# EAGLE board boomchak (EAGLE 5.11)
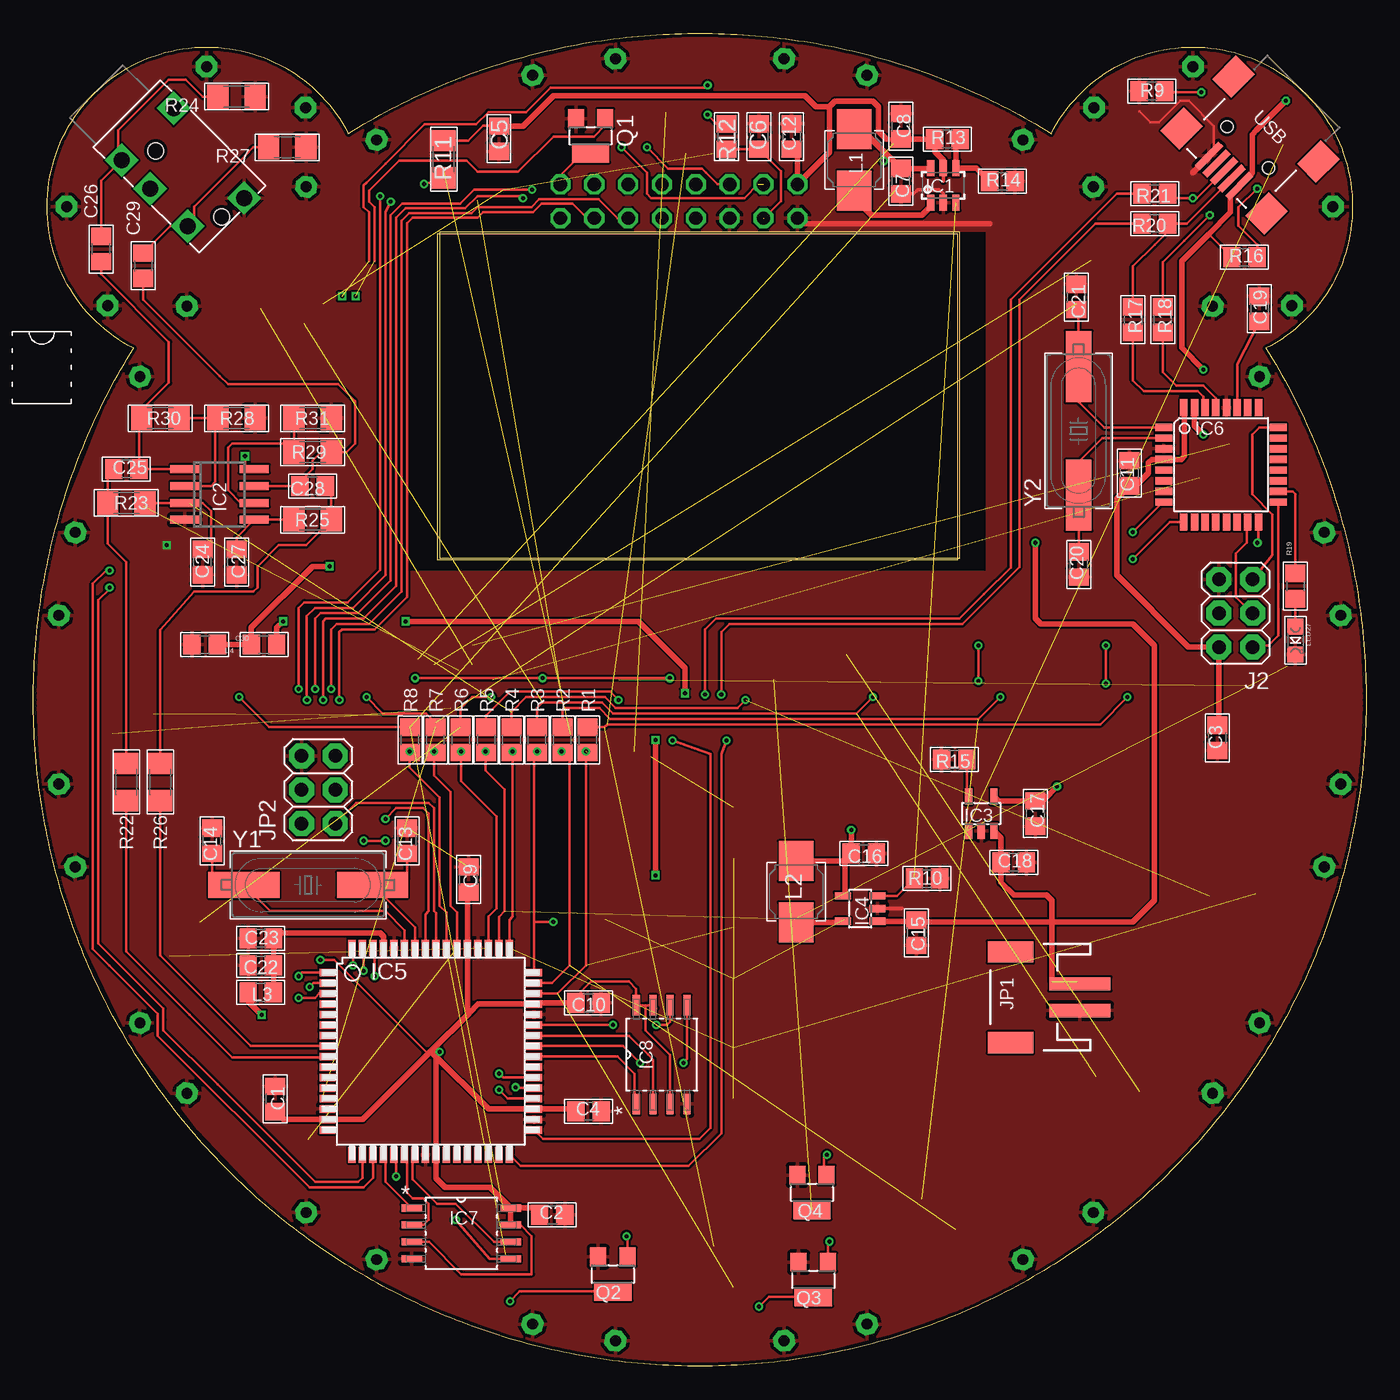
[diagram p0: board, top side]
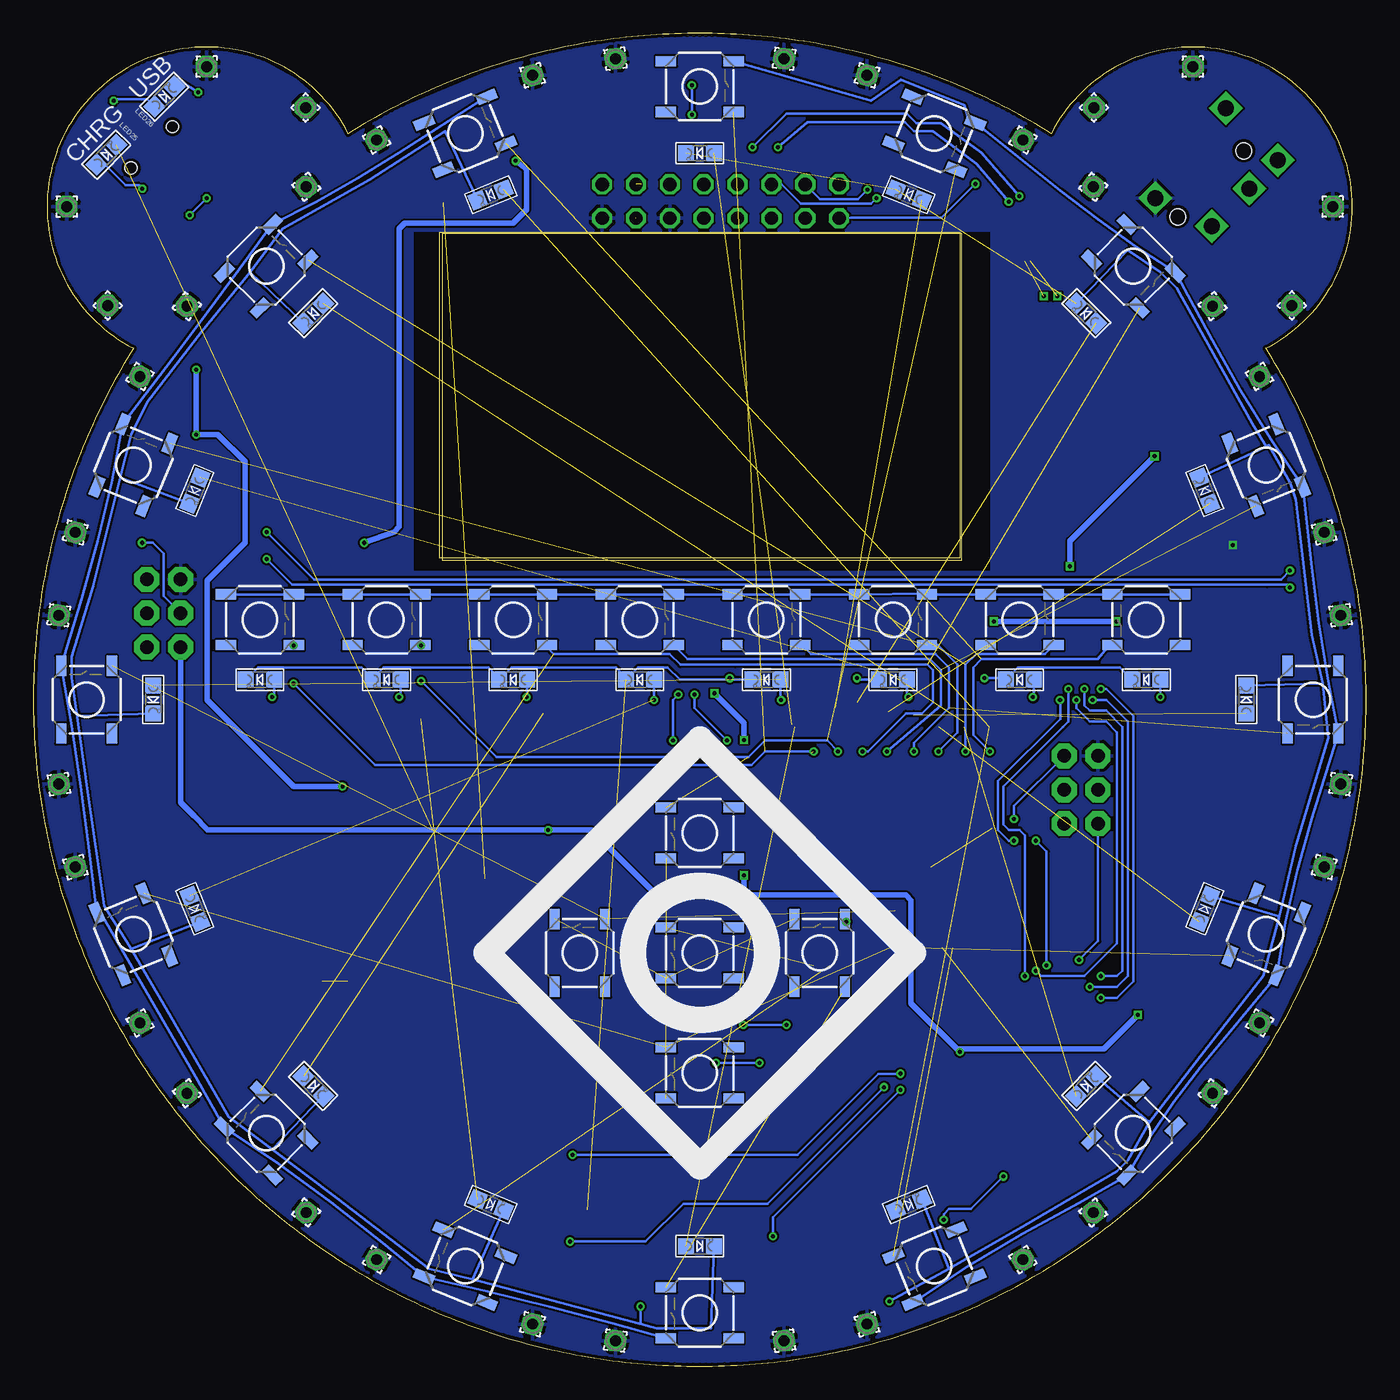
[diagram p1: board, bottom side, seen from below]

Size 100 x 100 mm. Coordinates in mm from the lower left corner, seen from the top.
Outline: 784 segments
Copper layers (1*16): Top 0.035mm / dielectric 1.5mm / Bottom 0.035mm
Design rules "Fusion_eagle_rule_v1.1": minimum track width 6mil, minimum drill 12mil, track to track 6mil, track to pad 6mil, pad to pad 6mil, via to via 6mil, smd to smd 0mil, copper to edge 10mil, drill to drill 10mil, minimum pad ring 10mil, minimum via ring 6mil, stop-mask expansion 2mil, vias tented up to drill 100mil, thermal gap 10mil
Milling: area 30.5,60.6 to 69.5,85.1

## Footprints (pad centres in the part's own frame; a part is rotated, then mirrored left to right if it is on the bottom)
0805 = smd 1.3 x 1.5: 1 -0.95,0; 2 0.95,0
SOT23-6 = smd 0.55 x 1.2: 1 0.32,-1.3; 2 1.27,-1.3; 3 2.22,-1.3; 4 2.22,1.3; 5 1.27,1.3; 6 0.32,1.3
SO08 = smd 0.6 x 2.2: 1 -1.905,-2.6; 2 -0.635,-2.6; 3 0.635,-2.6; 4 1.905,-2.6; 5 1.905,2.6; 6 0.635,2.6; 7 -0.635,2.6; 8 -1.905,2.6
SOT23-5L = smd 0.55 x 1.2: 1 -0.95,-1.3; 2 0,-1.3; 3 0.95,-1.3; 4 0.95,1.3; 5 -0.95,1.3
SOT23-5L' = smd 0.55 x 1.2: 1 -0.95,-1.35; 2 0,-1.35; 3 0.95,-1.35; 4 0.95,1.25; 5 -0.95,1.25
TQFP64 = smd 1.194 x 0.559: 1 -7.76,5.905; 2 -7.76,5.118; 3 -7.76,4.331; 4 -7.76,3.543; 5 -7.76,2.756; 6 -7.76,1.968; 7 -7.76,1.181; 8 -7.76,0.394; 9 -7.76,-0.394; 10 -7.76,-1.181; 11 -7.76,-1.968; 12 -7.76,-2.756; 13 -7.76,-3.543; 14 -7.76,-4.331; 15 -7.76,-5.118; 16 -7.76,-5.905; 33 7.76,-5.905; 34 7.76,-5.118; 35 7.76,-4.331; 36 7.76,-3.543; 37 7.76,-2.756; 38 7.76,-1.968; 39 7.76,-1.181; 40 7.76,-0.394; 41 7.76,0.394; 42 7.76,1.181; 43 7.76,1.968; 44 7.76,2.756; 45 7.76,3.543; 46 7.76,4.331; 47 7.76,5.118; 48 7.76,5.905 | smd 0.559 x 1.194: 17 -5.905,-7.76; 18 -5.118,-7.76; 19 -4.331,-7.76; 20 -3.543,-7.76; 21 -2.756,-7.76; 22 -1.968,-7.76; 23 -1.181,-7.76; 24 -0.394,-7.76; 25 0.394,-7.76; 26 1.181,-7.76; 27 1.968,-7.76; 28 2.756,-7.76; 29 3.543,-7.76; 30 4.331,-7.76; 31 5.118,-7.76; 32 5.905,-7.76; 49 5.905,7.76; 50 5.118,7.76; 51 4.331,7.76; 52 3.543,7.76; 53 2.756,7.76; 54 1.968,7.76; 55 1.181,7.76; 56 0.394,7.76; 57 -0.394,7.76; 58 -1.181,7.76; 59 -1.968,7.76; 60 -2.756,7.76; 61 -3.543,7.76; 62 -4.331,7.76; 63 -5.118,7.76; 64 -5.905,7.76
TQFP32-08 = smd 1.27 x 0.559: 1 -4.293,2.8; 2 -4.293,2; 3 -4.293,1.2; 4 -4.293,0.4; 5 -4.293,-0.4; 6 -4.293,-1.2; 7 -4.293,-2; 8 -4.293,-2.8; 17 4.293,-2.8; 18 4.293,-2; 19 4.293,-1.2; 20 4.293,-0.4; 21 4.293,0.4; 22 4.293,1.2; 23 4.293,2; 24 4.293,2.8 | smd 0.559 x 1.27: 9 -2.8,-4.293; 10 -2,-4.293; 11 -1.2,-4.293; 12 -0.4,-4.293; 13 0.4,-4.293; 14 1.2,-4.293; 15 2,-4.293; 16 2.8,-4.293; 25 2.8,4.293; 26 2,4.293; 27 1.2,4.293; 28 0.4,4.293; 29 -0.4,4.293; 30 -1.2,4.293; 31 -2,4.293; 32 -2.8,4.293
SOIC127P798X216-8N = smd 1.549 x 0.533: 1 -3.708,1.905; 2 -3.708,0.635; 3 -3.708,-0.635; 4 -3.708,-1.905; 5 3.708,-1.905; 6 3.708,-0.635; 7 3.708,0.635; 8 3.708,1.905
2X03 = drill 1.016 pad 1.88 octagon: 1 -2.54,-1.27; 2 -2.54,1.27; 3 0,-1.27; 4 0,1.27; 5 2.54,-1.27; 6 2.54,1.27
JST-2-SMD = smd 1 x 4.6: 1 -1,-3.7; 2 1,-3.7 | smd 1.6 x 3.4: NC1 -3.4,1.5; NC2 3.4,1.5
IND1515 = smd 3 x 2.6: P$1 -2.3,0; P$2 2.3,0
RT082A = drill 1 octagon: DB0 0.13,25.17; DB1 0.13,27.71; DB2 2.67,25.17; DB3 2.67,27.71; DB4 5.21,25.17; DB5 5.21,27.71; DB6 7.75,25.17; DB7 7.75,27.71; E -2.41,27.71; LED-A 10.29,25.17; LED-C 10.29,27.71; RS -4.95,27.71; RW -2.41,25.17; VCONT -4.95,25.17; VDD -7.49,27.71; VSS -7.49,25.17
CHIPLED_0805 = smd 1.2 x 1.2: A 0,-1.05; C 0,1.05
1,6/0,8 = drill 0.813 pad 1.6 octagon: 1 0,0
SOT23-W = smd 1.2 x 1.4: 1 -1.1,-1.3; 2 1.1,-1.3 | smd 2.8 x 1.4: 3 0,1.3
1206 = smd 1.6 x 1.8: 1 -1.4,0; 2 1.4,0
TACTILE_SWITCH_SMD = smd 1.524 x 0.762: 1 -2.54,1.905; 2 2.54,1.905; 3 -2.54,-1.905; 4 2.54,-1.905
PJ-320E = drill 1.2 square: P2 2.2,0; P3 5.2,0; P4 9.2,0; P5 10.7,4.5; P6 2.2,5.5 | hole 1.2: 3.5,2.3; 10.5,2.3
USB-MINIB = smd 2.5 x 0.5: D+ 2.5,0; D- 2.5,0.8; GND 2.5,-1.6; ID 2.5,-0.8; VBUS 2.5,1.6 | smd 2.5 x 2: MTN1 -3,4.5; MTN2 2.5,4.5; MTN3 -3,-4.5; MTN4 2.5,-4.5 | hole 0.9: 0,2.2; 0,-2.2
HC49UP = smd 5.334 x 1.93: 1 -4.826,0; 2 4.826,0

## Placement (x,y rotation side)
C1  [0805]  18.14,20.04 90 top
C2  [0805]  38.93,11.36 0 top
C3  [0805]  88.82,47.15 270 top
C4  [0805]  41.66,19.13 0 top
C5  10uF  [0805]  34.92,92.08 270 top
C6  100nF  [0805]  54.46,92.26 270 top
C7  4.7uF  [0805]  65.09,88.9 90 top
C8  10uF  [0805]  65.09,93.02 270 top
C9  [0805]  32.64,36.5 90 top
C10  [0805]  41.66,27.26 0 top
C11  [0805]  82.23,67 90 top
C12  100nF  [0805]  56.9,92.26 270 top
C13  18pF  [0805]  28.04,39.42 90 top
C14  18pF  [0805]  13.41,39.42 90 top
C15  4.7uF  [0805]  66.24,32.52 270 top
C16  4.7uF  [0805]  62.31,38.46 0 top
C17  4.7uF  [0805]  75.18,41.46 270 top
C18  4.7uF  [0805]  73.56,37.8 0 top
C19  1uf  [0805]  91.99,79.33 90 top
C20  18pF  [0805]  78.44,60.15 90 top
C21  18pF  [0805]  78.24,80.22 270 top
C22  100nF  [0805]  17.07,30.08 180 top
C23  4.7uF  [0805]  17.07,32.11 180 top
C24  100nF  [0805]  12.7,60.33 90 top
C25  100nF  [0805]  6.99,67.31 0 top
C26  10uF  [0805]  5.08,83.82 90 top
C27  100nF  [0805]  15.24,60.33 90 top
C28  100nF  [0805]  20.95,66.04 180 top
C29  10uF  [0805]  8.26,82.55 90 top
C30  10uF  [0805]  12.86,54.14 0 top
IC1  MCP1640  [SOT23-6]  66.99,88.6 0 top
IC2  MCP602SN  [SO08]  13.97,65.41 270 top
IC3  MCP73811/2  [SOT23-5L]  71.12,41.46 0 top
IC4  MCP1603  [SOT23-5L']  61.99,34.33 90 top
IC5  ATXMEGA64A3U  [TQFP64]  29.82,23.63 0 top
IC6  ATMEGA8U2AU  [TQFP32-08]  89.12,67.63 0 top
IC7  AT25DF161-SH-B  [SOIC127P798X216-8N]  32.11,9.96 0 top
IC8  AT25DF161-SH-B  [SOIC127P798X216-8N]  47.14,23.37 90 top
J2  AVR_SPI_PRG_6OFFSET_PADS  [2X03]  90.22,56.49 90 top
JP1  [JST-2-SMD]  74.82,27.68 90 top
JP2  [2X03]  21.39,43.25 90 top
L1  4.7uH  [IND1515]  61.59,90.5 270 top
L2  4.7uH  [IND1515]  57.23,35.6 90 top
L3  22R  [0805]  17.07,28.05 180 top
L4  22R  [0805]  17.3,54.14 180 top
LCD1  LCD_1X8  [RT082A]  49.84,60.96 0 bottom
LED1  [CHIPLED_0805]  50,91 90 bottom
LED2  [CHIPLED_0805]  34.31,87.88 67.5 bottom
LED3  [CHIPLED_0805]  21.01,78.99 45 bottom
LED4  [CHIPLED_0805]  12.12,65.69 22.5 bottom
LED5  [CHIPLED_0805]  9,50 0 bottom
LED6  [CHIPLED_0805]  12.12,34.31 337.5 bottom
LED7  [CHIPLED_0805]  21.01,21.01 315 bottom
LED8  [CHIPLED_0805]  34.31,12.12 292.5 bottom
LED9  [CHIPLED_0805]  50,9 270 bottom
LED10  [CHIPLED_0805]  65.69,12.12 247.5 bottom
LED11  [CHIPLED_0805]  78.99,21.01 225 bottom
LED12  [CHIPLED_0805]  87.88,34.31 202.5 bottom
LED13  [CHIPLED_0805]  91,50 180 bottom
LED14  [CHIPLED_0805]  87.88,65.69 157.5 bottom
LED15  [CHIPLED_0805]  78.99,78.99 135 bottom
LED16  [CHIPLED_0805]  65.69,87.88 112.5 bottom
LED17  [CHIPLED_0805]  83,51.5 90 bottom
LED18  [CHIPLED_0805]  73.5,51.5 90 bottom
LED19  [CHIPLED_0805]  64,51.5 90 bottom
LED20  [CHIPLED_0805]  54.5,51.5 90 bottom
LED21  [CHIPLED_0805]  45,51.5 90 bottom
LED22  [CHIPLED_0805]  35.5,51.5 90 bottom
LED23  [CHIPLED_0805]  26,51.5 90 bottom
LED24  [CHIPLED_0805]  16.5,51.5 90 bottom
LED25  [CHIPLED_0805]  94.51,90.89 315 bottom
LED26  [CHIPLED_0805]  90.17,95.25 315 bottom
LED27  [CHIPLED_0805]  94.69,54.46 180 top
M1  [1,6/0,8]  43.67,98.09 352.5 bottom
M2  [1,6/0,8]  37.45,96.85 345 bottom
M3  [1,6/0,8]  25.75,92.01 330 bottom
M4  [1,6/0,8]  20.48,88.48 322.5 bottom
M5  [1,6/0,8]  11.52,79.53 307.5 bottom
M6  [1,6/0,8]  8,74.25 300 bottom
M7  [1,6/0,8]  3.15,62.56 285 bottom
M8  [1,6/0,8]  1.92,56.33 277.5 bottom
M9  [1,6/0,8]  1.92,43.67 262.5 bottom
M10  [1,6/0,8]  3.15,37.45 255 bottom
M11  [1,6/0,8]  8,25.75 240 bottom
M12  [1,6/0,8]  11.52,20.48 232.5 bottom
M13  [1,6/0,8]  20.48,11.53 217.5 bottom
M14  [1,6/0,8]  25.75,8 210 bottom
M15  [1,6/0,8]  37.45,3.16 195 bottom
M16  [1,6/0,8]  43.67,1.92 187.5 bottom
M17  [1,6/0,8]  56.33,1.92 172.5 bottom
M18  [1,6/0,8]  62.55,3.16 165 bottom
M19  [1,6/0,8]  74.25,8 150 bottom
M20  [1,6/0,8]  79.53,11.53 142.5 bottom
M21  [1,6/0,8]  88.48,20.48 127.5 bottom
M22  [1,6/0,8]  92,25.75 120 bottom
M23  [1,6/0,8]  96.85,37.45 105 bottom
M24  [1,6/0,8]  98.08,43.67 97.5 bottom
M25  [1,6/0,8]  98.08,56.33 82.5 bottom
M26  [1,6/0,8]  96.85,62.56 75 bottom
M27  [1,6/0,8]  92,74.25 60 bottom
M28  [1,6/0,8]  88.48,79.53 52.5 bottom
M29  [1,6/0,8]  79.53,88.48 37.5 bottom
M30  [1,6/0,8]  74.25,92.01 30 bottom
M31  [1,6/0,8]  62.55,96.85 15 bottom
M32  [1,6/0,8]  56.33,98.09 7.5 bottom
M33  [1,6/0,8]  87,97.5 0 bottom
M34  [1,6/0,8]  79.58,94.43 315 bottom
M35  [1,6/0,8]  94.42,79.58 135 bottom
M36  [1,6/0,8]  97.5,87 90 bottom
M37  [1,6/0,8]  13,97.5 0 bottom
M38  [1,6/0,8]  2.5,87 270 bottom
M39  [1,6/0,8]  5.58,79.58 225 bottom
M40  [1,6/0,8]  20.43,94.43 45 bottom
Q1  [SOT23-W]  41.81,92.31 180 top
Q2  [SOT23-W]  43.48,6.91 180 top
Q3  [SOT23-W]  58.52,6.51 180 top
Q4  [SOT23-W]  58.42,13.03 180 top
R1  [0805]  41.59,46.99 90 top
R2  [0805]  39.69,46.99 90 top
R3  [0805]  37.78,46.99 90 top
R4  [0805]  35.88,46.99 90 top
R5  [0805]  33.97,46.99 90 top
R6  [0805]  32.07,46.99 90 top
R7  [0805]  30.16,46.99 90 top
R8  [0805]  28.26,46.99 90 top
R9  220  [0805]  83.91,95.66 0 top
R10  20k  [0805]  67.06,36.58 180 top
R11  68R  [1206]  30.8,90.54 90 top
R12  10k  [0805]  52.02,92.26 270 top
R13  976k  [0805]  68.58,92.07 0 top
R14  309k  [0805]  72.71,88.89 180 top
R15  6.8k  [0805]  69.09,45.52 180 top
R16  220  [0805]  90.87,83.19 180 top
R17  22R  [0805]  82.51,78.52 270 top
R18  22R  [0805]  84.73,78.52 270 top
R19  120R  [0805]  94.69,58.53 90 top
R20  0R  [0805]  84.14,85.73 180 top
R21  0R  [0805]  84.14,87.95 180 top
R22  68R  [1206]  6.99,43.82 90 top
R23  68R  [1206]  6.99,64.77 0 top
R24  68R  [1206]  15.24,95.25 180 top
R25  68R  [1206]  20.95,63.5 180 top
R26  68R  [1206]  9.53,43.82 90 top
R27  68R  [1206]  19.05,91.44 180 top
R28  68R  [1206]  15.24,71.12 180 top
R29  68R  [1206]  20.95,68.58 180 top
R30  68R  [1206]  9.53,71.12 0 top
R31  68R  [1206]  20.95,71.12 0 top
S1  [TACTILE_SWITCH_SMD]  50,96 0 bottom
S2  [TACTILE_SWITCH_SMD]  32.4,92.5 337.5 bottom
S3  [TACTILE_SWITCH_SMD]  17.47,82.53 315 bottom
S4  [TACTILE_SWITCH_SMD]  7.5,67.61 292.5 bottom
S5  [TACTILE_SWITCH_SMD]  4,50 270 bottom
S6  [TACTILE_SWITCH_SMD]  7.5,32.4 247.5 bottom
S7  [TACTILE_SWITCH_SMD]  17.47,17.48 225 bottom
S8  [TACTILE_SWITCH_SMD]  32.4,7.51 202.5 bottom
S9  [TACTILE_SWITCH_SMD]  50,4 180 bottom
S10  [TACTILE_SWITCH_SMD]  67.6,7.51 157.5 bottom
S11  [TACTILE_SWITCH_SMD]  82.53,17.48 135 bottom
S12  [TACTILE_SWITCH_SMD]  92.5,32.4 112.5 bottom
S13  [TACTILE_SWITCH_SMD]  96,50 90 bottom
S14  [TACTILE_SWITCH_SMD]  92.5,67.61 67.5 bottom
S15  [TACTILE_SWITCH_SMD]  82.53,82.53 45 bottom
S16  [TACTILE_SWITCH_SMD]  67.6,92.5 22.5 bottom
S17  [TACTILE_SWITCH_SMD]  83,56 0 bottom
S18  [TACTILE_SWITCH_SMD]  73.5,56 0 bottom
S19  [TACTILE_SWITCH_SMD]  64,56 0 bottom
S20  [TACTILE_SWITCH_SMD]  54.5,56 0 bottom
S21  [TACTILE_SWITCH_SMD]  45,56 0 bottom
S22  [TACTILE_SWITCH_SMD]  35.5,56 0 bottom
S23  [TACTILE_SWITCH_SMD]  26,56 0 bottom
S24  [TACTILE_SWITCH_SMD]  16.5,56 180 bottom
S25  [TACTILE_SWITCH_SMD]  50,31 180 bottom
S26  [TACTILE_SWITCH_SMD]  50,40 180 bottom
S27  [TACTILE_SWITCH_SMD]  41,31 90 bottom
S28  [TACTILE_SWITCH_SMD]  50,22 180 bottom
S29  [TACTILE_SWITCH_SMD]  59,31 90 bottom
U$4  JACK4-PJ320  [PJ-320E]  5.08,92.03 315 top
USB  USB-MINIB-5PIN  [USB-MINIB]  91.11,91.44 225 top
Y1  8 MHz  [HC49UP]  20.62,36.1 0 top
Y2  8 MHz  [HC49UP]  78.42,70.17 90 top

## Library data of the parts
C1-C30 L3 L4 LED1-LED27 Q1-Q4 R1-R31 Y1 Y2 = microbuilder
IC1 IC4 IC5 L1 L2 LCD1 U$4 = SmallRoomLabs
IC2 = linear
IC3 = adafruit
IC6 J2 JP1 JP2 S1-S29 USB = SparkFun
IC7 IC8 = SmallRoomLabs; DESCRIPTION: 16-megabit Minimum SPI Serial Flash Memory; MPN: AT25DF161-SH-B; OC_FARNELL: 1715442; OC_NEWARK: 15R0307; PACKAGE: SOIC-8; SUPPLIER: Atmel
M1-M40 = wirepad

## Nets
!SHDN: IC1.3 IC4.3 R10.2
+5V: C5.1 C8.2 C12.2 IC1.5 LCD1.VDD R11.2 R13.1
A3U_D+: IC5.33 R21.2
A3U_D-: IC5.32 R20.2
A3U_PDI: IC5.56 JP2.1
A3U_PDI-CLK: IC5.57 JP2.5
A3U_XTAL1: C13.1 IC5.58 Y1.2
A3U_XTAL2: C14.1 IC5.59 Y1.1
AVCC: C22.1 C23.1 IC5.61 L3.1
CHRG_A: LED25.A R16.1
CHRG_C: IC3.1 LED25.C
DAC0: IC5.8 R26.1
DAC1: IC5.9 R22.1
GND: C1.2 C2.2 C3.2 C4.2 C5.2 C6.1 C7.1 C8.1 C9.2 C10.2 C11.2 C12.1 C13.2 C14.2 C15.2 C16.2 C17.2 C18.2 C19.2 C20.1 C21.1 C22.2 C23.2 C24.1 C27.1 C30.1 IC1.2 IC2.4 IC3.2 IC4.2 IC5.14 IC5.24 IC5.34 IC5.44 IC5.52 IC5.60 IC6.3 IC6.28 IC7.4 IC8.4 J2.6 JP1.1 JP2.6 LCD1.RW LCD1.VSS LED27.C M1.1 M2.1 M3.1 M4.1 M5.1 M6.1 M7.1 M8.1 M9.1 M10.1 M11.1 M12.1 M13.1 M14.1 M15.1 M16.1 M17.1 M18.1 M19.1 M20.1 M21.1 M22.1 M23.1 M24.1 M25.1 M26.1 M27.1 M28.1 M29.1 M30.1 M31.1 M32.1 M33.1 M34.1 M35.1 M36.1 M37.1 M38.1 M39.1 M40.1 Q1.2 Q2.2 Q3.2 Q4.2 R9.1 R10.1 R14.1 R15.2 R24.1 R27.1 R28.1 R31.2 U$4.P5 USB.GND
KEY0: S1.2 S2.2 S3.2 S4.2 S5.2 S6.2 S7.2 S8.2
KEY1: S9.2 S10.2 S11.2 S12.2 S13.2 S14.2 S15.2 S16.2
KEY2: S17.1 S17.2 S18.1 S18.2 S19.1 S19.2 S20.1 S20.2 S21.1 S21.2 S22.1 S22.2 S23.1 S23.2 S24.3 S24.4
KEY3: S25.2 S26.2 S27.2 S28.2 S29.2
KEYLED0: IC5.46 R1.1 S1.4 S9.4 S17.4 S25.4
KEYLED0R: LED1.A LED9.A LED17.A R1.2
KEYLED1: IC5.47 R2.1 S2.4 S10.4 S18.4 S26.4
KEYLED1R: LED2.A LED10.A LED18.A R2.2
KEYLED2: IC5.48 R3.1 S3.4 S11.4 S19.4 S27.4
KEYLED2R: LED3.A LED11.A LED19.A R3.2
KEYLED3: IC5.49 R4.1 S4.4 S12.4 S20.4 S28.4
KEYLED3R: LED4.A LED12.A LED20.A R4.2
KEYLED4: IC5.50 R5.1 S5.4 S13.4 S21.4 S29.4
KEYLED4R: LED5.A LED13.A LED21.A R5.2
KEYLED5: IC5.51 R6.1 S6.4 S14.4 S22.4
KEYLED5R: LED6.A LED14.A LED22.A R6.2
KEYLED6: IC5.54 R7.1 S7.4 S15.4 S23.4
KEYLED6R: LED7.A LED15.A LED23.A R7.2
KEYLED7: IC5.55 R8.1 S8.4 S16.4 S24.2
KEYLED7R: LED8.A LED16.A LED24.A R8.2
LCD_BACKLIGHT: Q1.1
LCD_C: LCD1.LED-C Q1.3
LCD_CONTRAST: R12.1
LCD_DB4: IC5.62 LCD1.DB4
LCD_DB5: IC5.63 LCD1.DB5
LCD_DB6: IC5.64 LCD1.DB6
LCD_DB7: IC5.1 LCD1.DB7
LCD_E: IC5.3 LCD1.E
LCD_RS: IC5.2 LCD1.RS
LED0: IC5.36 Q2.1
LED0A: LED1.C LED2.C LED3.C LED4.C LED5.C LED6.C LED7.C LED8.C Q2.3
LED1: IC5.37 Q3.1
LED1A: LED9.C LED10.C LED11.C LED12.C LED13.C LED14.C LED15.C LED16.C Q3.3
LED2: IC5.38 Q4.1
LED2A: LED17.C LED18.C LED19.C LED20.C LED21.C LED22.C LED23.C LED24.C Q4.3
LEFT: C26.2 R24.2 U$4.P2
N$1: LCD1.LED-A R11.1
N$2: IC1.4 R13.2 R14.2
N$3: IC3.5 R15.1
N$4: C19.1 IC6.27
N$5: IC6.16 J2.4
N$6: IC6.17 J2.1
N$7: IC6.18 R19.2
N$8: IC1.1 L1.P$2
N$9: C21.2 IC6.1 Y2.2
N$10: IC6.15 J2.3
N$11: IC6.24 J2.5
N$12: IC4.5 L2.P$1
N$13: LED27.A R19.1
N$14: C25.1 R22.2 R23.1
N$15: C24.2 IC2.3 R23.2
N$16: C25.2 C26.1 IC2.1 R30.1
N$17: C28.1 R25.1 R26.2
N$18: C27.2 IC2.5 R25.2
N$19: C20.2 IC6.2 Y2.1
N$20: IC6.30 R17.2
N$21: IC6.29 R18.2
N$22: C28.2 C29.1 IC2.7 R29.1
N$23: IC2.6 R29.2 R31.1
N$24: IC2.2 R28.2 R30.2
N$25: C30.2 IC2.8 L4.2
POW_C: LED26.C R9.2
RIGHT: C29.2 R27.2 U$4.P4
RX: IC5.19 IC6.8
SPI1_MISO: IC5.22 IC7.2
SPI1_MOSI: IC5.21 IC7.5
SPI1_SCK: IC5.23 IC7.6
SPI1_SS: IC5.20 IC7.1
SPI2_MISO: IC5.42 IC8.2
SPI2_MOSI: IC5.41 IC8.5
SPI2_SCK: IC5.43 IC8.6
SPI2_SS: IC5.40 IC8.1
TX: IC5.18 IC6.9
USBD+: R18.1 R21.1 USB.D+
USBD-: R17.1 R20.1 USB.D-
VBAT: C7.2 C15.1 C18.1 IC1.6 IC3.3 IC4.1 JP1.2 L1.P$1
VBUS: C17.1 IC3.4 IC6.31 LED26.A R16.2 USB.VBUS
VCC: C1.1 C2.1 C3.1 C4.1 C9.1 C10.1 C11.1 C16.1 IC4.4 IC5.15 IC5.25 IC5.35 IC5.45 IC5.53 IC6.4 IC6.32 IC7.3 IC7.7 IC7.8 IC8.3 IC8.7 IC8.8 J2.2 JP2.2 L2.P$2 L3.2 L4.1
VCONT: C6.2 LCD1.VCONT R12.2

## Tracks (layer width: path | path; a pad name or v marks a point on that pad's centre or on a via)
!SHDN  (1 unrouted)
  Top 0.203: IC4.3 64.81,35.28 R10.2
+5V
  Top 0.203: R11.2 32.6,91.94 33.73,93.07 34.88,93.07 C5.1
  Top 0.254: IC1.5 68.26,88.9
  Top 0.305: 67.3,92.08 R13.1 | 65.41,92.07 C8.2 63.99,92.07 | 68.26,90.49 IC1.5
  Top 0.406: 65.41,92.07 R13.1 | 68.26,90.49 67.63,91.13 R13.1 | 63.99,92.07 63.4,92.66 63.4,94.29 63.4,94.49 62.99,94.9 60.15,94.9 59.74,94.49 | 59.74,94.49 59.74,91.09 LCD1.VDD 57.33,91.28 C12.2 | 59.74,94.49 58.73,94.49 57.91,95.3 45.92,95.3 39.02,95.3 36.74,93.03 C5.1
A3U_D+  (via drill 0.3)
  Top 0.203: R21.2 81.28,87.95 73.34,80.01 73.34,60.65 73.34,59.93 71.32,57.92 69.49,56.09 51.21,56.09 50.39,55.27 v50.39,50.4 | v47.95,46.94 50.8,45.93 50.8,17.89 49.99,17.07 38.23,17.07 IC5.33
  Bottom 0.203: v50.39,50.4 50.39,49.38 v47.95,46.94
A3U_D-  (via drill 0.3)
  Top 0.203: R20.2 79.69,85.73 73.98,80.01 73.98,61.6 73.98,60.65 73.98,59.96 69.7,55.68 52.22,55.68 51.61,55.07 v51.61,50.4 | v52.02,46.94 51.61,45.93 51.61,17.48 49.17,15.04 36.55,15.04 IC5.32
  Bottom 0.203: v52.02,46.94 52.02,49.99 v51.61,50.4
A3U_PDI
  Top 0.203: IC5.56 30.21,34 30.07,34.14 30.07,41.86 29.67,42.27 24.22,42.27 JP2.1
A3U_PDI-CLK  (via drill 0.3)
  Top 0.203: IC5.57 29.43,33.9 29.67,34.14 29.67,41.46 29.26,41.86 27.23,41.86 v26.42,41.05
  Bottom 0.203: v26.42,41.05 26.42,42.03 JP2.5
A3U_XTAL1
  Top 0.203: IC5.58 28.64,32.91 Y1.2 | Y1.2 25.67,36.1 | C13.1 28.04,36.58 27.64,36.17 25.52,36.17 Y1.2
A3U_XTAL2
  Top 0.203: IC5.59 27.85,32.71 26.42,34.14 17.76,34.14 Y1.1 15.72,36.17 13.41,36.17 C14.1
AVCC
  Top 0.203: C23.1 18.43,32.52
  Top 0.406: L3.1 C22.1 C23.1 | 18.43,32.52 21.95,32.52 26.01,32.52 26.28,32.25 IC5.61
CHRG_A  (via drill 0.3)
  Top 0.203: R16.1 91.82,83.69 91.82,84.16 90.42,85.55 90.42,86.96 v91.82,88.36
  Bottom 0.203: LED25.A 94.62,90.15 93.07,88.6 92.06,88.6 v91.82,88.36
CHRG_C  (1 unrouted)
  Top 0.254: IC3.1 70.04,40.27
DAC0
  Top 0.203: IC5.8 16.31,24.02 9.53,30.8 R26.1
DAC1
  Top 0.203: R22.1 6.99,31.12 11.75,26.36 14.92,23.18 22.01,23.18 IC5.9
GND  (via drill 0.3)  (1 unrouted)
  Top 0.203: 83,94.17 83.82,93.35 84.45,93.35 86.04,94.94 86.68,94.94 88.58,93.03 88.58,91.18 USB.GND
  Top 0.254: IC4.2 63.35,34.34 65.16,34.34 | IC1.2 68.26,87.95 67.94,88.27 66.36,88.27 66.04,87.95 C7.1
  Top 0.406: USB.GND 88.21,90.75 87,89.54 | LCD1.VSS 57.73,85.73 71.75,85.73
  other vias: 10,61.6
  pour Bottom: 0,49.53 0.64,56.84 2.22,63.82 5.71,72.71 7.62,76.2 5.08,78.43 2.54,81.28 1.59,84.14 1.27,87.63 1.59,90.49 3.17,93.98 6.99,97.16 11.11,98.75 14.61,98.75 17.78,97.79 20.64,96.21 22.86,93.67 23.5,92.4 27.94,94.62 33.97,97.16 41.91,99.06 49.21,99.7 54.61,99.7 60.33,98.75 65.72,97.16 73.34,93.98 76.52,92.08 77.79,94.3 80.33,96.52 83.19,98.11 86.36,98.75 89.53,98.54 92.39,97.48 94.93,95.89 97.16,93.03 98.11,91.13 98.74,89.22 98.74,86.68 98.42,84.46 97.79,81.92 96.52,80.01 94.61,78.11 92.39,76.52 92.71,75.57 96.2,68.9 98.42,62.23 99.38,55.88 99.69,51.76 99.69,47.31 99.38,43.82 98.42,37.79 96.52,32.39 94.3,27.31 91.12,21.91 87.31,17.15 82.87,12.7 77.15,8.26 70.8,4.77 64.77,2.54 57.15,0.64 52.7,0.32 46.99,0.32 40.96,0.96 35.24,2.54 30.16,4.45 23.81,7.62 17.78,12.07 12.38,17.78 7.3,24.45 3.49,32.39 1.91,36.83 0.64,42.55 0.32,47.95
  pour Top: 0,49.53 0.64,56.84 2.22,63.82 5.71,72.71 7.62,76.2 5.08,78.43 2.54,81.28 1.59,84.14 1.27,87.63 1.59,90.49 3.17,93.98 6.99,97.16 11.11,98.75 14.61,98.75 17.78,97.79 20.64,96.21 22.86,93.67 23.5,92.4 27.94,94.62 33.97,97.16 41.91,99.06 49.21,99.7 54.61,99.7 60.33,98.75 65.72,97.16 73.34,93.98 76.52,92.08 77.79,94.3 80.33,96.52 83.19,98.11 86.36,98.75 89.53,98.54 92.39,97.48 94.93,95.89 97.16,93.03 98.11,91.13 98.74,89.22 98.74,86.68 98.42,84.46 97.79,81.92 96.52,80.01 94.61,78.11 92.39,76.52 92.71,75.57 96.2,68.9 98.42,62.23 99.38,55.88 99.69,51.76 99.69,47.31 99.38,43.82 98.42,37.79 96.52,32.39 94.3,27.31 91.12,21.91 87.31,17.15 82.87,12.7 77.15,8.26 70.8,4.77 64.77,2.54 57.15,0.64 52.7,0.32 46.99,0.32 40.96,0.96 35.24,2.54 30.16,4.45 23.81,7.62 17.78,12.07 12.38,17.78 7.3,24.45 3.49,32.39 1.91,36.83 0.64,42.55 0.32,47.95
KEY0
  Bottom 0.203: S8.2 arc8 21.51,12.25 S7.2 arc11 12.45,22.41 S6.2 arc9 4.09,41.08 S5.2 arc5 4.09,59.92 S4.2 arc6 11.56,76.99 S3.2 arc6 22.94,88.19 S2.2 29.79,93.29 30.16,94.62 34.92,96.52 37.15,94.94 S1.2
KEY1
  Bottom 0.203: S16.2 72.54,91.04 arc7 S15.2 arc1 89.43,75.75 S14.2 arc7 96.37,57.61 S13.2 arc3 95.83,38.94 95.31,34.65 | 95.31,34.65 S12.2 | 95.31,34.65 87.83,21.7 S11.2 arc6 73.79,9.25 S10.2 arc3 56.54,3.2 S9.2
KEY2
  Bottom 0.203: S24.3 S24.4 S23.2 S23.1 S22.2 33.07,57.97 S22.1 S21.2 S21.1 S20.2 S20.1 S19.2 S19.1 S18.2 S18.1 S17.2 S17.1
KEY3  (4 unrouted)
KEYLED0  (via drill 0.3)  (4 unrouted)
  Top 0.203: v80.47,51.21 v80.47,54.05 | IC5.46 39.33,27.96 41.45,30.08 41.45,45.9 R1.1
  Bottom 0.203: v41.45,46.13 45.11,46.13 46.13,45.11 74.37,45.11 v80.47,51.21 | v80.47,54.05 S17.4
KEYLED0R  (via drill 0.3)  (2 unrouted)
  Top 0.203: R1.2 42.86,47.94 43.08,48.16 80.06,48.16 v82.09,50.19
  Bottom 0.203: v82.09,50.19 81.95,50.19 LED17.A
KEYLED1  (via drill 0.3)  (3 unrouted)
  Top 0.203: v39.62,46.13 R2.1 40.23,45.5 40.23,30.08 38.9,28.74 IC5.47 | v70.92,51.41 v70.92,54.05
  Bottom 0.203: v39.62,46.13 40.44,46.94 45.11,46.94 46.33,45.72 65.23,45.72 v70.92,51.41 | v70.92,54.05 v70.92,54.06 S18.4
KEYLED1R  (via drill 0.3)  (2 unrouted)
  Top 0.203: R2.2 39.69,49.24 39.83,49.38 42.47,49.38 43.28,48.57 70.92,48.57 v72.54,50.19
  Bottom 0.203: v72.54,50.19 72.45,50.19 LED18.A
KEYLED2  (via drill 0.3)  (2 unrouted)
  Top 0.203: v37.8,46.13 R3.1 37.58,45.84 37.58,33.33 | IC5.48 37.58,33.33 | 37.58,33.33 v39.01,33.33
  Bottom 0.203: v37.8,46.13 37.39,46.13 34.54,48.97 33.93,48.97 33.33,48.97 32.51,49.79 32.51,52.23 32.92,52.63 47.35,52.63 51.46,52.63 52.27,53.45 60.96,53.45 61.46,53.95 S19.4 | v39.01,33.33 S27.4
KEYLED2R  (via drill 0.3)  (2 unrouted)
  Top 0.203: R3.2 37.78,49.37 38.2,49.79 42.67,49.79 43.48,48.97 61.77,48.97 v62.99,50.19
  Bottom 0.203: v62.99,50.19 62.95,50.19 LED19.A
KEYLED3  (via drill 0.3)  (3 unrouted)
  Top 0.203: v35.97,46.13 R4.1 35.97,45.95 35.97,33.73 35.73,33.49 IC5.49
  Bottom 0.203: S20.4 50.9,53.04 32.72,53.04 31.9,52.23 31.9,49.58 v35.97,46.13
KEYLED3R  (via drill 0.3)  (2 unrouted)
  Top 0.203: R4.2 35.88,49.09 36.98,50.19 42.88,50.19 43.69,49.38 52.83,49.38 v53.44,49.99
  Bottom 0.203: v53.44,49.99 v53.45,49.99 LED20.A
KEYLED4  (via drill 0.3)  (3 unrouted)
  Top 0.203: v33.93,46.13 R5.1 33.93,46.01 33.93,44.71 35.36,43.29 35.36,34.14 34.94,33.72 IC5.50
  Bottom 0.203: v33.93,46.13 33.93,46.74 31.29,49.38 31.29,52.43 32.31,53.45 41.66,53.45 42.31,54.1 S21.4
KEYLED4R  (via drill 0.3)  (2 unrouted)
  Top 0.203: R5.2 33.97,48.81 35.76,50.6 43.28,50.6 v43.89,49.99
  Bottom 0.203: v43.89,49.99 43.95,49.99 LED21.A
KEYLED5  (via drill 0.3)  (2 unrouted)
  Top 0.203: R6.1 v32.11,46.13 | 32.11,46.01 R6.1 | IC5.51 34.15,33.75 34.75,34.34 34.75,41.25 32.11,43.89 32.11,46.01 | 32.11,46.01 R6.1
  Bottom 0.203: v32.11,46.13 30.68,47.55 30.68,52.63 32.15,54.1 S22.4
KEYLED5R  (via drill 0.3)  (2 unrouted)
  Top 0.203: R6.2 32.07,49.34 32.92,50.19 v34.34,50.19
  Bottom 0.203: v34.34,50.19 34.45,50.19 LED22.A
KEYLED6  (via drill 0.3)  (2 unrouted)
  Top 0.203: v30.07,46.13 R7.1 30.07,45.95 30.07,44.3 31.29,43.08 31.29,34.55 31.79,34.05 IC5.54
  Bottom 0.203: v30.07,46.13 30.07,52.63 29.26,53.45 24.11,53.45 S23.4
KEYLED6R  (via drill 0.3)  (2 unrouted)
  Top 0.203: R7.2 30.16,48.28 29.46,48.97 26.21,48.97 v24.99,50.19
  Bottom 0.203: v24.99,50.19 24.95,50.19 LED23.A
KEYLED7  (via drill 0.3)  (2 unrouted)
  Top 0.203: R8.1 v28.25,46.13 28.25,44.91 30.48,42.68 30.48,34.55 31,34.03 IC5.55
  Bottom 0.203: S24.2 19.26,54.1 20.12,53.04 28.85,53.04 29.46,52.43 29.46,47.35 v28.25,46.13
KEYLED7R  (via drill 0.3)  (2 unrouted)
  Top 0.203: R8.2 17.69,47.94 v15.44,50.19
  Bottom 0.203: v15.44,50.19 v15.45,50.19 LED24.A
LCD_BACKLIGHT  (via drill 0.3)  (1 unrouted)
  Top 0.203: Q1.1 42.91,93.1 42.06,92.26 39.01,92.26 36.37,89.61 33.33,89.61 32.51,90.43 27.64,90.43 27.43,90.43 25.2,88.19 25.2,87.38 25.6,86.97 25.6,82.91
  other vias: 24.18,80.27
LCD_C
  Top 0.203: LCD1.LED-C 39.55,89.35 41.2,91.01 Q1.3
LCD_CONTRAST  (via drill 0.3)  (1 unrouted)
  Top 0.203: 51.95,93.27 R12.1 51.27,93.21 v50.6,93.88 | v50.6,96.12 50.39,95.91 38.81,95.91 36.98,94.09 34.14,94.09 33.22,93.17 29.36,93.17 26.42,90.22 24.99,88.8 24.79,88.6 24.79,86.97 25.2,86.57 25.2,82.91
  Bottom 0.203: v50.6,96.12 v50.6,93.88
  other vias: 23.16,80.27
LCD_DB4  (via drill 0.3)
  Top 0.178: LCD1.DB4 43.84,86.13 42.41,87.57 38.14,87.57 37.96,87.57 37.36,86.97 33.33,86.97 32.87,86.52 32,86.52
  Top 0.203: 32,86.52 28.19,86.52 27.64,85.96 27.64,82.71 27.64,59.74 27.64,58.12 25.2,55.68 22.76,55.68 22.35,55.27 v22.35,50.8 | IC5.62 25.6,31.27 v25.6,29.26
  Bottom 0.203: v22.35,50.8 22.35,48.37 22.76,47.96 27.23,43.49 27.23,42.27 27.23,40.64 26.82,40.24 26.01,40.24 25.6,39.83 v25.6,29.26
LCD_DB5  (via drill 0.3)
  Top 0.178: 32,86.87 32.41,86.87 33.33,87.79 34.95,87.79 36.58,87.79 v36.73,87.63
  Top 0.203: 32,86.87 27.94,86.87 27.23,86.16 27.23,82.71 27.23,59.74 27.23,58.53 24.79,56.09 21.95,56.09 21.74,55.88 v21.74,49.99 | IC5.63 24.79,31.3 v24.79,29.67
  Bottom 0.178: LCD1.DB5 43.86,88.67 42.41,87.21 38.14,87.21 37.15,87.21 v36.73,87.63
  Bottom 0.203: v21.74,49.99 21.74,49.38 20.73,48.37 19.51,48.37 18.69,47.55 18.69,31.7 21.13,29.26 24.38,29.26 v24.79,29.67
LCD_DB6  (via drill 0.3)
  Top 0.178: LCD1.DB6 41.53,86.13 40.45,87.21 38.14,87.21 37.49,86.57 33.73,86.57 33.33,86.16 32,86.16
  Top 0.203: 32,86.16 28.45,86.16 28.04,85.75 28.04,82.71 28.04,59.74 28.04,57.71 25.6,55.27 23.16,55.27 22.96,55.07 v22.96,49.99 | IC5.64 23.98,31.32 v23.98,30.08 | v24.79,39.42 v26.42,39.42
  Bottom 0.203: v22.96,49.99 22.96,48.57 27.64,43.89 27.64,40.24 26.82,39.42 v26.42,39.42 | v24.79,39.42 23.98,38.61 v23.98,30.08
LCD_DB7  (via drill 0.3)
  Top 0.178: 32,87.23 33.06,88.28 v37.43,88.28
  Top 0.203: 32,87.23 27.69,87.23 26.82,86.36 26.82,82.71 26.82,59.74 26.82,58.93 24.38,56.49 21.54,56.49 21.13,56.09 v21.13,50.8 | IC5.1 20.18,29.53 v19.91,29.26
  Bottom 0.178: LCD1.DB7 40.98,87.57 38.14,87.57 v37.43,88.28
  Bottom 0.203: v21.13,50.8 21.13,49.58 20.73,49.18 19.51,49.18 18.29,47.96 18.29,29.67 18.69,29.26 v19.91,29.26
LCD_E  (via drill 0.3)
  Top 0.203: LCD1.E 51.35,88.67 50.48,89.54 50.16,89.86 47.62,89.86 v46.04,91.44 | v26.01,87.79 26.01,82.71 26.01,59.74 23.57,57.31 20.32,57.31 19.91,56.9 v19.91,50.8 | IC5.3 21.45,27.96 21.13,27.64 v19.91,27.64
  Bottom 0.203: v46.04,91.44 43.5,93.98 35.56,93.98 34.44,93.98 33.73,93.27 31.9,93.27 28.85,91.04 v26.01,87.79 | v19.91,50.8 19.51,50.8 17.48,48.77 17.48,28.86 18.69,27.64 v19.91,27.64
LCD_RS  (via drill 0.3)  (1 unrouted)
  Top 0.203: 54.38,88.67 53.34,87.63 46.35,87.63 46.04,87.95 46.04,89.54 v44.13,91.44 | v26.82,87.38 26.42,86.57 26.42,82.71 26.42,59.74 26.42,59.34 23.98,56.9 21.13,56.9 20.52,56.29 v20.52,49.99 | IC5.2 21.02,28.74 v20.73,28.45
  Bottom 0.203: v44.13,91.44 41.91,93.35 35.56,93.35 34.62,93.35 33.93,92.66 32.51,92.66 29.26,90.22 v26.82,87.38 | v20.52,49.99 19.51,49.99 17.88,48.37 17.88,29.26 18.69,28.45 v20.73,28.45
LED0  (via drill 0.3)
  Top 0.203: IC5.36 35.6,20.08 v34.95,20.73 | Q2.1 44.59,9.67 v44.5,9.76
  Bottom 0.203: v44.5,9.76 44.5,11.18 v34.95,20.73
LED0A  (via drill 0.3)  (2 unrouted)
  Top 0.203: Q2.3 36.49,5.61 v35.76,4.88
  Bottom 0.203: 16.26,18.29 LED7.C | 16.26,18.29 12.19,23.57 7.72,29.26 6.5,33.73 | 6.5,33.73 LED6.C | 3.25,51.21 LED5.C | 3.25,51.21 2.85,47.15 5.28,39.02 6.5,33.73 | 7.49,69.01 7.32,69.09 5.69,66.25 5.28,65.03 4.06,54.87 3.25,51.21 | 7.49,69.01 LED4.C | LED3.C 17.88,83.72 15.44,82.1 14.22,80.88 8.53,70.72 7.49,69.01 | 31.29,7.32 LED8.C | 31.29,7.32 25.6,10.57 18.69,14.63 17.88,15.45 16.26,18.29 | 31.29,7.32 v35.76,4.88
LED1  (via drill 0.3)
  Top 0.203: IC5.37 36.44,20.87 v36.17,20.93 | Q3.1 59.62,9.23 v59.74,9.35
  Bottom 0.203: v59.74,9.35 54.05,9.35 51.21,12.2 44.91,12.2 v36.17,20.93
LED1A  (via drill 0.3)
  Top 0.203: Q3.3 55.19,5.21 v54.46,4.47
  Bottom 0.203: LED16.C 69.09,92.66 74.78,89.01 81.28,85.35 83.72,82.1 | 83.72,82.1 LED15.C | 93.47,66.65 92.66,69.9 91.44,72.34 87.38,77.63 83.72,82.1 | 93.47,66.65 LED14.C | LED13.C 96.72,48.77 96.79,49.23 | 96.79,49.23 97.13,51.62 97.13,53.24 95.5,58.53 93.47,66.65 | LED12.C 92.66,31.3 92.77,31.48 | 92.77,31.48 94.69,34.55 95.91,43.08 96.79,49.23 | 82.09,16.26 LED11.C | 82.09,16.26 85.34,18.7 89.81,26.42 92.77,31.48 | 67.06,6.51 LED10.C | 67.06,6.51 70.31,7.32 77.22,12.6 82.09,16.26 | LED9.C 49.17,2.85 53.24,2.85 54.48,3.18 | 54.48,3.18 67.06,6.51 | v54.46,4.47 54.46,3.2 54.48,3.18
LED2  (via drill 0.3)
  Top 0.203: IC5.38 35.24,21.66 v34.95,21.95 | Q4.1 59.44,14.33 59.33,14.23 59.33,15.65 v59.54,15.85
  Bottom 0.203: v59.54,15.85 42.67,15.85 36.58,21.95 v34.95,21.95
LED2A  (via drill 0.3)  (1 unrouted)
  Top 0.203: v47.75,51.62 v38.2,51.62 v28.65,51.62
  Bottom 0.203: LED17.C 83.12,52.43 75.39,52.43 74.55,51.59 | 74.55,51.59 LED18.C | 74.55,51.59 73.71,52.43 65.84,52.43 65.05,51.64 LED19.C 64.12,52.43 56.29,52.43 55.55,51.69 LED20.C 54.62,52.43 52.43,52.43 51.5,51.5 LED21.C 47.75,51.5 v47.75,51.62 | LED24.C 17.57,51.5 18.49,52.43 26.12,52.43 LED23.C 27.16,51.62 v28.65,51.62 | v38.2,51.62 38.09,51.5 LED22.C
LEFT
  Top 0.203: R24.2 12.7,95.25 11.43,96.52 10.16,96.52 6.35,92.71 6.35,90.76 U$4.P2 5.08,88.93 C26.2
N$1  (via drill 0.3)
  Top 0.203: v29.31,88.7 30.94,89 R11.1
  Bottom 0.178: LCD1.LED-A 38.67,86.16 32.11,86.16 31.85,86.16 v29.31,88.7
N$2
  Top 0.254: IC1.4
  Top 0.305: 69.21,91.75 R13.2
  Top 0.406: R14.2 70.75,89.9 IC1.4 69.21,91.75
N$3
  Top 0.203: IC3.5 70.04,42.89 R15.1
N$4
  Top 0.203: C19.1 90.32,75.17 IC6.27
N$5  (via drill 0.3)
  Top 0.203: IC6.16 91.92,61.85 v91.85,61.78
  Bottom 0.203: v91.85,61.78 91.03,61.78 90.22,60.96 90.22,57.76 J2.4
N$6
  Top 0.203: IC6.17 93.41,54.8 92.66,54.05 91.44,54.05 J2.1
N$7
  Top 0.203: IC6.18 94.49,65.63 94.69,65.43 R19.2
N$8
  Top 0.406: L1.P$2 61.59,87.63 62.87,86.36 66.67,86.36 67.31,87 IC1.1
N$9
  Top 0.203: C21.2 78.42,79.06 Y2.2 78.44,74.98 78.44,72.34 80.35,70.43 IC6.1
N$10
  Top 0.203: J2.3 91.44,56.49 90.22,57.71 90.22,60.96 91.03,61.78 91.03,63.26 IC6.15
N$11
  Top 0.203: IC6.24 91.97,70.43 91.44,69.9 91.44,65.43 92.96,63.91 92.96,60.86 J2.5
N$12
  Top 0.254: 60.66,33.3 IC4.5
  Top 0.406: L2.P$1 60.66,33.3
N$13
  Top 0.203: LED27.A R19.1
N$14
  Top 0.203: C25.1 5.58,66.86 R23.1 5.58,61.73 6.99,60.33 R22.2
N$15
  Top 0.203: R23.2 IC2.3 12.7,64.77 13.34,64.14 13.34,61.91 C24.2
N$16
  Top 0.203: IC2.1 C25.2 7.93,70.93 R30.1 8.12,71.76 10.16,73.79 10.16,76.84 5.08,81.92 C26.1
N$17
  Top 0.203: R25.1 22.36,65.59 C28.1 | R26.2 9.53,55.25 12.06,58.11 16.51,58.11 16.83,58.42 16.83,60.01 18.41,61.6 20.45,61.6 R25.1 | R25.1 22.23,63.37
N$18
  Top 0.203: R25.2 IC2.5 15.24,62.17 C27.2
N$19
  Top 0.203: C20.2 Y2.1 78.42,67.86 78.44,67.87 80.19,69.63 IC6.2
N$20
  Top 0.152: 87.88,72.01 IC6.30
  Top 0.203: 87.88,72.01 87.78,72.11 87.78,72.75 87.38,73.16 83.31,73.16 82.51,73.96 R17.2
N$21
  Top 0.203: IC6.29 88.72,72.63 87.78,73.56 85.75,73.56 85.34,73.97 84.73,74.58 R18.2
N$22
  Top 0.203: IC2.7 C28.2 20.32,66.36 20.32,66.68 20.95,67.31 20.95,67.95 21.59,68.58 R29.1 23.5,68.58 24.13,69.22 24.13,72.39 22.86,73.66 14.61,73.66 13.97,74.3 8.26,80.01 C29.1
N$23
  Top 0.203: R31.1 R29.2 18.92,69.22 14.92,69.22 14.61,68.9 14.61,65.73 15.56,64.77 IC2.6
N$24
  Top 0.203: R30.2 R28.2 13.65,70.94 13.65,66.36 13.34,66.04 IC2.2
N$25  (via drill 0.3)
  Top 0.203: IC2.8 15.88,67.31 v15.88,68.27
  Top 0.406: C30.2 L4.2 | L4.2 | L4.2 16.35,55.41 20.95,60.01 v22.23,60.01
  Bottom 0.406: v22.23,60.01 22.23,61.92 v15.88,68.27
POW_C  (via drill 0.3)
  Top 0.203: v87.63,95.57 84.96,95.57 R9.2
  Bottom 0.203: LED26.C 89.33,96.63 v87.63,95.57
RIGHT
  Top 0.203: R27.2 16.51,91.44 15.88,90.81 12.06,87 12.06,86.01 U$4.P4 10.28,85.53 C29.2
RX  (via drill 0.3)
  Top 0.203: IC5.19 25.49,14.11 24.79,13.41 20.73,13.41 9.35,24.79 9.35,26.42 5.69,30.08 4.47,31.3 4.47,37.8 4.47,57.71 4.47,58.7 5.46,59.69 v5.71,59.69 | IC6.8 84.74,64.83 v82.5,62.59
  Bottom 0.203: v82.5,62.59 78.94,59.03 77.52,59.03 7.32,59.03 6.38,59.03 v5.71,59.69
SPI1_MISO
  Top 0.203: IC7.2 29.29,10.6 29.67,10.98 29.67,12.2 29.26,12.6 28.45,12.6 28.04,13.01 28.04,13.82 28.04,15.68 IC5.22
SPI1_MOSI  (via drill 0.3)
  Top 0.203: IC5.21 27.23,15.7 v27.23,14.23 | v31.7,10.98 34.21,8.06 IC7.5
  Bottom 0.203: v27.23,14.23 29.67,11.79 31.29,11.79 31.7,11.38 v31.7,10.98
SPI1_SCK
  Top 0.203: IC7.6 34.57,9.33 31.7,12.2 30.28,12.2 28.45,14.02 28.45,15.68 IC5.23
SPI1_SS
  Top 0.203: IC7.1 28.37,11.87 26.42,13.82 26.42,15.73 IC5.20
SPI2_MISO
  Top 0.203: IC5.42 37.59,24.79 44.7,24.79 46.1,23.4 46.51,22.99 IC8.2
SPI2_MOSI  (via drill 0.3)
  Top 0.203: IC5.41 44.26,24.02 v45.52,22.76 | v48.77,22.76 49.05,23.04 IC8.5
  Bottom 0.203: v45.52,22.76 v48.77,22.76
SPI2_SCK  (via drill 0.3)
  Top 0.203: IC5.43 37.59,25.61 v43.48,25.61 | v46.74,25.61 47.55,25.61 47.78,25.84 IC8.6
  Bottom 0.203: v43.48,25.61 v46.74,25.61
SPI2_SS
  Top 0.203: IC5.40 43.83,23.23 45.11,21.95 45.11,19.79 IC8.1
TX  (via drill 0.3)
  Top 0.203: IC5.18 24.7,14.14 24.38,13.82 21.13,13.82 13.82,21.14 9.75,25.2 9.75,26.01 9.75,26.83 4.88,31.7 4.88,57.48 5.71,58.32 v5.71,58.42 | IC6.9 85.28,63.34 v82.5,60.56
  Bottom 0.178: 80.57,58.63 v82.5,60.56
  Bottom 0.203: 80.57,58.63 14.33,58.63 7.44,58.63 5.92,58.63 v5.71,58.42
USBD+  (via drill 0.3)
  Top 0.203: USB.D+ 87.3,87.63 v87,87.63 85.41,87.63 R21.1 | v88.27,86.36 86.36,84.46 84.73,82.83 R18.1
  Bottom 0.203: v88.27,86.36 v87,87.63
USBD-
  Top 0.203: USB.D- 86.53,85.73 R20.1 85.09,85.09 84.14,84.14 82.51,82.52 R17.1
VBAT  (via drill 0.3)  (1 unrouted)
  Top 0.254: 67.27,89.85 IC1.6
  Top 0.406: 64.06,90.88 62.14,92.8 | 64.06,90.88 C7.2 67.27,89.85 | 76.4,33.33 76.4,28.86 | 64.06,90.88 63.8,90.63 v63.8,90.43 | v75.18,61.78 75.18,56.09 75.59,55.68 82.5,55.68 84.12,54.05 84.12,36.58 84.12,34.95 82.5,33.33 76.81,33.33 | JP1.2 78.33,28.86 | IC4.1 65.76,33.38 C15.1 66.38,33.33 76.4,33.33 | 76.4,33.33 76.81,33.33 | 76.4,33.33 76.81,33.33 | IC3.3 72.61,39.62 C18.1 72.61,36.31 73.56,35.36 76,35.36 76.4,34.95 76.4,33.33
  Top 0.813: 62.14,92.8 L1.P$1
  Bottom 0.406: v63.8,90.43 62.99,89.82 62.99,86.77 64.01,85.75 72.14,85.75 72.54,85.35 72.54,82.1 72.54,63 72.95,62.59 v75.18,61.78
VBUS  (via drill 0.3)
  Top 0.203: R16.2 89.92,83.21 88.19,84.94
  Top 0.406: v93.98,94.94 91.76,92.71 91.44,92.4 91.44,89.54 90.47,88.57 USB.VBUS 90.47,88.45 89.81,87.79 89.81,86.57 88.19,84.94 86.16,82.91 86.16,76.41 v87.78,74.78 | v87.78,69.9 87.12,70.57 IC6.31 | v76.81,43.49 75.8,42.48 C17.1 72.42,42.41 IC3.4
  Bottom 0.203: LED26.A 91.44,95.04 93.88,95.04 v93.98,94.94
  Bottom 0.406: v87.78,74.78 v87.78,69.9 86.16,69.9 84.12,67.87 84.12,61.78 86.97,58.93 86.97,52.43 86.97,49.99 80.47,43.49 v76.81,43.49
VCC  (via drill 0.3)
  Top 0.203: 18.74,18.51 C1.1 | 45.92,27.08 IC8.8 45.24,28.32 44.7,28.86 41.86,28.86 40.71,27.7 C10.1 | 45.92,27.08 IC8.7 | IC8.3 47.78,22.53 47.78,23.35 45.92,25.2 45.92,27.08 | IC8.7 46.53,27.05 | 32.58,35.49 C9.1 | IC8.7 46.74,26.85 | IC7.3 29.69,9.33 32.11,6.91 37.39,6.91 37.39,9.76 36.55,10.6 IC7.7 | C11.1 82.81,66.15 | v21.54,30.48 22.55,30.48 29.62,23.42 | 88.95,48.22 C3.1
  Top 0.254: C16.1 60.88,37.99 60.8,37.9 | 60.88,35.43 IC4.4
  Top 0.406: 60.8,37.9 L2.P$2 | 60.88,37.99 60.88,35.43 | 18.74,18.51 IC5.15 24.7,18.51 29.62,23.42 29.82,23.63 | 29.82,23.63 32.68,26.48 | 32.68,26.48 33.36,27.17 IC5.45 37.67,27.26 C10.1 | 29.97,23.47 30.21,23.23 IC5.25 30.21,14.09 30.89,13.41 34.27,13.41 IC7.8 | 29.97,23.47 29.82,23.63 | 29.97,23.47 29.82,23.63 | 29.97,23.47 34.15,19.29 IC5.35 40.13,19.29 C4.1 | 32.68,26.48 32.58,26.58 IC5.53 32.58,35.49 | IC7.7 IC7.8 | C2.1 37.47,11.87 IC7.8 | 29.97,23.47 v30.48,23.57 | v61.37,40.24 C16.1 | v46.67,36.83 v46.67,46.99 | v27.94,55.88 45.4,55.88 48.9,52.39 v48.9,50.49 | L4.1 18.25,55.4 v18.73,55.88 | 88.95,48.22 J2.2 86.67,53.95 81.28,59.34 81.28,64.14 | 81.28,64.14 81.28,64.62 | IC6.32 86.36,71.88 86.36,68.27 86.12,68.03 IC6.4 83.9,68.03 83.66,67.79 83.66,67 82.81,66.15 | C11.1 81.28,65.09 81.28,64.14 | L3.2 16.12,27.38 v17.14,26.36
  Bottom 0.203: JP2.2 20.12,31.91 v21.54,30.48
  Bottom 0.406: 46.67,35.36 34.54,35.36 34.14,34.95 34.14,27.23 v30.48,23.57 30.48,23.82 19.68,23.82 v17.14,26.36 | 46.67,35.36 53.24,35.36 58.12,40.24 v61.37,40.24 86.91,40.24 87.95,41.28 88.95,42.28 J2.2 | 46.67,35.36 v46.67,36.83 | v46.67,46.99 46.67,48.26 v48.9,50.49 | v27.94,55.88 v18.73,55.88
VCONT  (1 unrouted)
  Top 0.203: R12.2 53.44,91.31 C6.2 56.1,89.67 56.1,87.39 54.84,86.13 54.69,86.13

## Text on the board
bPlace: USB | CHRG